# Altium PCB PCB2.PcbDoc (part 3 of 5)
Units mil, origin at the board's own origin, x right, y up, seen from the top; angles counter-clockwise.
Board outline 6000 x 4000 mil, 2 copper layers (Top Layer, Bottom Layer); 109 components, 117 nets, 490 pads, 96 vias.
Unrouted connection lines stored in the file: 3.
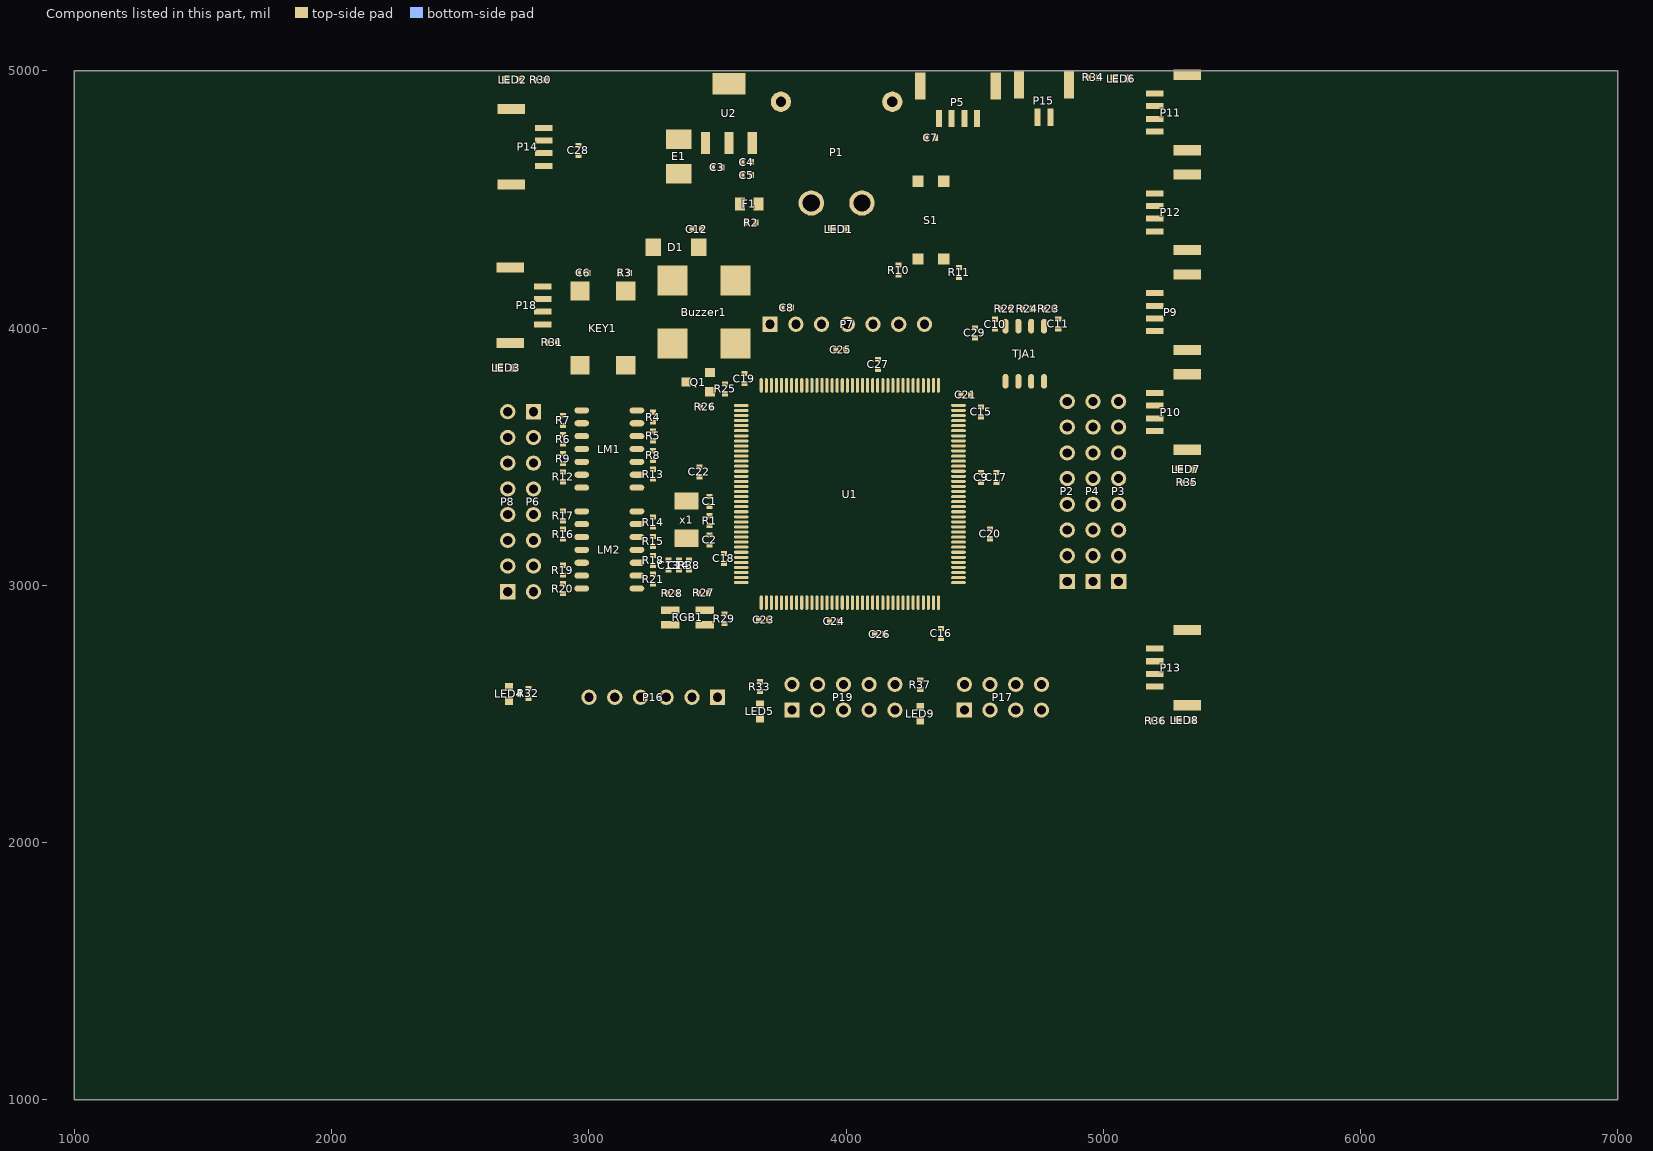
[diagram p3: the components of this part, seen from the top]

## Via types
v1: diameter 19.68, hole 11.81, Top Layer to Bottom Layer, tented both sides, 64 vias
v2: diameter 39, hole 30, Top Layer to Bottom Layer, tented both sides, 17 vias
v3: diameter 30, hole 20, Top Layer to Bottom Layer, tented both sides, 15 vias

## Nets (pads, with @x,y where several pads share a name; then routed paths per layer and width w, separated by ;. In a path a pad name is that pad's centre, name@x,y a point inside that pad or via, vN(x,y) a via of type N, cw(c..) or ccw(c..) an arc to the next point about the centre after c; other vN are vias at no path point) (continued)
copper on no net: (continued)
  Top Layer w1: 3344.33,2020 3448.67,2020 ; 3344.33,2021 3447.67,2021 ; 3344.33,2022 3446.67,2022 ; 3344.33,2023 3445.67,2023 ; 3344.33,2024 3443.67,2024 ; 3345.33,2017 3448.67,2017 ; 3345.33,2018 3448.67,2018 ; 3345.33,2019 3449.67,2019 ; 3346.33,2015 3447.67,2015 ; 3346.33,2016 3447.67,2016 ; 3347.33,2064 3532.67,2064 ; 3348.33,2063 3526.67,2063 ; 3348.33,2065 3535.67,2065 ; 3348.33,2066 3538.67,2066 ; 3348.33,2067 3540.67,2067 ; 3348.33,2068 3542.67,2068 ; 3349.33,2069 3544.67,2069 ; 3349.33,2070 3546.67,2070 ; 3349.33,2071 3548.67,2071 ; 3350.33,2072 3549.67,2072 ; 3350.33,2073 3551.67,2073 ; 3350.33,2074 3552.67,2074 ; 3350.33,2075 3554.67,2075 ; 3351.33,1933 3366.67,1933 ; 3351.33,1934 3366.67,1934 ; 3351.33,1935 3366.67,1935 ; 3351.33,1936 3366.67,1936 ; 3351.33,1937 3366.67,1937 ; 3351.33,1938 3366.67,1938 ; 3351.33,1939 3366.67,1939 ; 3351.33,1940 3366.67,1940 ; 3351.33,1941 3366.67,1941 ; 3351.33,1942 3366.67,1942 ; 3351.33,1943 3366.67,1943 ; 3351.33,1944 3366.67,1944 ; 3351.33,1945 3366.67,1945 ; 3351.33,1946 3366.67,1946 ; 3351.33,1947 3366.67,1947 ; 3351.33,1948 3366.67,1948 ; 3351.33,1949 3366.67,1949 ; 3351.33,1950 3366.67,1950 ; 3351.33,1951 3366.67,1951 ; 3351.33,1952 3366.67,1952 ; 3351.33,1953 3366.67,1953 ; 3351.33,1954 3366.67,1954 ; 3351.33,1955 3366.67,1955 ; 3351.33,1956 3366.67,1956 ; 3351.33,1957 3366.67,1957 ; 3351.33,1958 3366.67,1958 ; 3351.33,1959 3366.67,1959 ; 3351.33,1960 3366.67,1960 ; 3351.33,1961 3366.67,1961 ; 3351.33,1962 3366.67,1962 ; 3351.33,1963 3366.67,1963 ; 3351.33,1964 3366.67,1964 ; 3351.33,1965 3366.67,1965 ; 3351.33,1966 3366.67,1966 ; 3351.33,1967 3366.67,1967 ; 3351.33,1968 3366.67,1968 ; 3351.33,1969 3366.67,1969 ; 3351.33,1970 3366.67,1970 ; 3351.33,1971 3366.67,1971 ; 3351.33,1972 3366.67,1972 ; 3351.33,1973 3366.67,1973 ; 3351.33,1974 3366.67,1974 ; 3351.33,1975 3366.67,1975 ; 3351.33,1976 3366.67,1976 ; 3351.33,1977 3366.67,1977 ; 3351.33,1978 3366.67,1978 ; 3351.33,1979 3366.67,1979 ; 3351.33,1980 3366.67,1980 ; 3351.33,1981 3366.67,1981 ; 3351.33,1982 3366.67,1982 ; 3351.33,1983 3366.67,1983 ; 3351.33,1984 3366.67,1984 ; 3351.33,1985 3366.67,1985 ; 3351.33,1986 3366.67,1986 ; 3351.33,1987 3366.67,1987 ; 3351.33,1988 3366.67,1988 ; 3351.33,1989 3366.67,1989 ; 3351.33,1990 3366.67,1990 ; 3351.33,1991 3366.67,1991 ; 3351.33,1992 3366.67,1992 ; 3351.33,1993 3366.67,1993 ; 3351.33,1994 3440.67,1994 ; 3351.33,1995 3441.67,1995 ; 3351.33,1996 3441.67,1996 ; 3351.33,1997 3442.67,1997 ; 3351.33,1998 3443.67,1998 ; 3351.33,1999 3443.67,1999 ; 3351.33,2000 3444.67,2000 ; 3351.33,2001 3444.67,2001 ; 3351.33,2002 3443.67,2002 ; 3351.33,2003 3441.67,2003 ; 3351.33,2004 3366.67,2004 ; 3351.33,2005 3366.67,2005 ; 3351.33,2006 3366.67,2006 ; 3351.33,2007 3366.67,2007 ; 3351.33,2076 3555.67,2076 ; 3351.33,2077 3557.67,2077 ; 3351.33,2078 3558.67,2078 ; 3351.33,2079 3560.67,2079 ; 3352.33,2080 3561.67,2080 ; 3352.33,2081 3562.67,2081 ; 3352.33,2082 3564.67,2082 ; 3353.33,2083 3565.67,2083 ; 3353.33,2084 3566.67,2084 ; 3353.33,2085 3568.67,2085 ; 3353.33,2086 3569.67,2086 ; 3354.33,2087 3570.67,2087 ; 3354.33,2088 3572.67,2088 ; 3354.33,2089 3573.67,2089 ; 3354.33,2090 3574.67,2090 ; 3355.33,2091 3575.67,2091 ; 3355.33,2092 3577.67,2092 ; 3355.33,2093 3578.67,2093 ; 3355.33,2094 3579.67,2094 ; 3356.33,2095 3580.67,2095 ; 3356.33,2096 3582.67,2096 ; 3356.33,2097 3583.67,2097 ; 3357.33,2098 3584.67,2098 ; 3357.33,2099 3585.67,2099 ; 3357.33,2100 3587.67,2100 ; 3357.33,2101 3588.67,2101 ; 3358.33,2102 3589.67,2102 ; 3358.33,2103 3590.67,2103 ; 3358.33,2104 3761.67,2104 ; 3358.33,2105 3762.67,2105 ; 3359.33,2106 3763.67,2106 ; 3359.33,2107 3763.67,2107 ; 3359.33,2108 3764.67,2108 ; 3360.33,2109 3765.67,2109 ; 3360.33,2110 3766.67,2110 ; 3360.33,2111 3767.67,2111 ; 3360.33,2112 3767.67,2112 ; 3361.33,2113 3768.67,2113 ; 3361.33,2114 3769.67,2114 ; 3361.33,2115 3769.67,2115 ; 3361.33,2116 3770.67,2116 ; 3362.33,2117 3771.67,2117 ; 3362.33,2118 3771.67,2118 ; 3362.33,2119 3772.67,2119 ; 3362.33,2120 3772.67,2120 ; 3363.33,2121 3772.67,2121 ; 3363.33,2122 3772.67,2122 ; 3363.33,2123 3773.67,2123 ; 3364.33,2124 3773.67,2124 ; 3364.33,2125 3773.67,2125 ; 3364.33,2126 3434.67,2126 ; 3364.33,2127 3434.67,2127 ; 3365.33,2128 3434.67,2128 ; 3365.33,2129 3434.67,2129 ; 3365.33,2130 3434.67,2130 ; 3365.33,2131 3435.67,2131 ; 3366.33,2132 3435.67,2132 ; 3366.33,2133 3435.67,2133 ; 3366.33,2134 3436.67,2134 ; 3367.33,2135 3436.67,2135 ; 3367.33,2136 3436.67,2136 ; 3367.33,2137 3436.67,2137 ; 3367.33,2138 3437.67,2138 ; 3368.33,2139 3437.67,2139 ; 3368.33,2140 3437.67,2140 ; 3368.33,2141 3437.67,2141 ; 3368.33,2142 3438.67,2142 ; 3369.33,1960 3419.67,1960 ; 3369.33,1961 3418.67,1961 ; 3369.33,2143 3438.67,2143 ; 3369.33,2144 3438.67,2144 ; 3369.33,2145 3438.67,2145 ; 3369.33,2146 3439.67,2146 ; 3370.33,1956 3422.67,1956 ; 3370.33,1957 3422.67,1957 ; 3370.33,1958 3422.67,1958 ; 3370.33,1959 3420.67,1959 ; 3370.33,1978 3417.67,1978 ; 3370.33,2147 3439.67,2147 ; 3370.33,2148 3439.67,2148 ; 3370.33,2149 3440.67,2149 ; 3371.33,1953 3420.67,1953 ; 3371.33,1954 3420.67,1954 ; 3371.33,1955 3421.67,1955 ; 3371.33,1975 3420.67,1975 ; 3371.33,1976 3419.67,1976 ; 3371.33,1977 3418.67,1977 ; 3371.33,2150 3440.67,2150 ; 3371.33,2151 3440.67,2151 ; 3371.33,2152 3440.67,2152 ; 3371.33,2153 3441.67,2153 ; 3372.33,1972 3419.67,1972 ; 3372.33,1973 3420.67,1973 ; 3372.33,1974 3421.67,1974 ; 3372.33,2154 3441.67,2154 ; 3372.33,2155 3441.67,2155 ; 3372.33,2156 3441.67,2156 ; 3372.33,2157 3442.67,2157 ; 3373.33,1970 3418.67,1970 ; 3373.33,1971 3418.67,1971 ; 3373.33,2158 3442.67,2158 ; 3373.33,2159 3442.67,2159 ; 3373.33,2160 3442.67,2160 ; 3374.33,2161 3443.67,2161 ; 3374.33,2162 3443.67,2162 ; 3374.33,2163 3443.67,2163 ; 3374.33,2164 3444.67,2164 ; 3375.33,1992 3383.67,1992 ; 3375.33,2165 3444.67,2165 ; 3375.33,2166 3444.67,2166 ; 3375.33,2167 3444.67,2167 ; 3375.33,2168 3445.67,2168 ; 3376.33,1990 3387.67,1990 ; 3376.33,1991 3385.67,1991 ; 3376.33,1993 3381.67,1993 ; 3376.33,2169 3445.67,2169 ; 3376.33,2170 3445.67,2170 ; 3376.33,2171 3445.67,2171 ; 3376.33,2172 3446.67,2172 ; 3377.33,1988 3389.67,1988 ; 3377.33,1989 3388.67,1989 ; 3377.33,2173 3446.67,2173 ; 3377.33,2174 3446.67,2174 ; 3377.33,2175 3447.67,2175 ; 3378.33,1987 3390.67,1987 ; 3378.33,2176 3447.67,2176 ; 3378.33,2177 3447.67,2177 ; 3378.33,2178 3447.67,2178 ; 3378.33,2179 3448.67,2179 ; 3379.33,1985 3390.67,1985 ; 3379.33,1986 3390.67,1986 ; 3379.33,2180 3448.67,2180 ; 3379.33,2181 3448.67,2181 ; 3379.33,2182 3448.67,2182 ; 3379.33,2183 3449.67,2183 ; 3380.33,1983 3390.67,1983 ; 3380.33,1984 3390.67,1984 ; 3380.33,2184 3449.67,2184 ; 3380.33,2185 3449.67,2185 ; 3380.33,2186 3449.67,2186 ; 3380.33,2187 3450.67,2187 ; 3381.33,1981 3389.67,1981 ; 3381.33,1982 3389.67,1982 ; 3381.33,2188 3450.67,2188 ; 3381.33,2189 3450.67,2189 ; 3381.33,2190 3451.67,2190 ; 3382.33,1979 3387.67,1979 ; 3382.33,1980 3388.67,1980 ; 3382.33,2191 3451.67,2191 ; 3382.33,2192 3451.67,2192 ; 3382.33,2193 3451.67,2193 ; 3382.33,2194 3452.67,2194 ; 3383.33,2195 3452.67,2195 ; 3383.33,2196 3452.67,2196 ; 3383.33,2197 3452.67,2197 ; 3383.33,2198 3453.67,2198 ; 3384.33,2199 3453.67,2199 ; 3384.33,2200 3453.67,2200 ; 3384.33,2201 3453.67,2201 ; 3385.33,2004 3400.67,2004 ; 3385.33,2005 3400.67,2005 ; 3385.33,2202 3454.67,2202 ; 3385.33,2203 3454.67,2203 ; 3385.33,2204 3454.67,2204 ; 3385.33,2205 3454.67,2205 ; 3386.33,2006 3400.67,2006 ; 3386.33,2007 3400.67,2007 ; 3386.33,2008 3400.67,2008 ; 3386.33,2009 3400.67,2009 ; 3386.33,2010 3400.67,2010 ; 3386.33,2011 3400.67,2011 ; 3386.33,2012 3401.67,2012 ; 3386.33,2013 3401.67,2013 ; 3386.33,2014 3401.67,2014 ; 3386.33,2206 3455.67,2206 ; 3386.33,2207 3455.67,2207 ; 3386.33,2208 3455.67,2208 ; 3386.33,2209 3455.67,2209 ; 3387.33,1952 3401.67,1952 ; 3387.33,2025 3402.67,2025 ; 3387.33,2026 3402.67,2026 ; 3387.33,2027 3402.67,2027 ; 3387.33,2210 3456.67,2210 ; 3387.33,2211 3456.67,2211 ; 3387.33,2212 3456.67,2212 ; 3387.33,2213 3457.67,2213 ; 3388.33,1937 3401.67,1937 ; 3388.33,1938 3401.67,1938 ; 3388.33,1939 3401.67,1939 ; 3388.33,1940 3401.67,1940 ; 3388.33,1941 3401.67,1941 ; 3388.33,1942 3401.67,1942 ; 3388.33,1943 3401.67,1943 ; 3388.33,1944 3401.67,1944 ; 3388.33,1945 3401.67,1945 ; 3388.33,1946 3401.67,1946 ; 3388.33,1947 3401.67,1947 ; 3388.33,1948 3401.67,1948 ; 3388.33,1949 3401.67,1949 ; 3388.33,1950 3401.67,1950 ; 3388.33,1951 3401.67,1951 ; 3388.33,1962 3401.67,1962 ; 3388.33,1963 3401.67,1963 ; 3388.33,1964 3401.67,1964 ; 3388.33,1965 3401.67,1965 ; 3388.33,1966 3401.67,1966 ; 3388.33,1967 3401.67,1967 ; 3388.33,1968 3401.67,1968 ; 3388.33,1969 3401.67,1969 ; 3388.33,2028 3402.67,2028 ; 3388.33,2029 3402.67,2029 ; 3388.33,2030 3402.67,2030 ; 3388.33,2031 3403.67,2031 ; 3388.33,2032 3403.67,2032 ; 3388.33,2033 3403.67,2033 ; 3388.33,2034 3403.67,2034 ; 3388.33,2035 3403.67,2035 ; 3388.33,2036 3403.67,2036 ; 3388.33,2037 3403.67,2037 ; 3388.33,2214 3457.67,2214 ; 3388.33,2215 3457.67,2215 ; 3388.33,2216 3457.67,2216 ; 3389.33,2217 3458.67,2217 ; 3389.33,2218 3458.67,2218 ; 3389.33,2219 3458.67,2219 ; 3389.33,2220 3458.67,2220 ; 3390.33,2221 3459.67,2221 ; 3390.33,2222 3459.67,2222 ; 3390.33,2223 3459.67,2223 ; 3390.33,2224 3459.67,2224 ; 3391.33,2225 3460.67,2225 ; 3391.33,2226 3460.67,2226 ; 3391.33,2227 3460.67,2227 ; 3392.33,2228 3461.67,2228 ; 3392.33,2229 3461.67,2229 ; 3392.33,2230 3461.67,2230 ; 3392.33,2231 3461.67,2231 ; 3393.33,2232 3462.67,2232 ; 3393.33,2233 3462.67,2233 ; 3393.33,2234 3462.67,2234 ; 3393.33,2235 3462.67,2235 ; 3394.33,2236 3463.67,2236 ; 3394.33,2237 3463.67,2237 ; 3394.33,2238 3463.67,2238 ; 3394.33,2239 3463.67,2239 ; 3395.33,1979 3404.67,1979 ; 3395.33,2240 3464.67,2240 ; 3395.33,2241 3464.67,2241 ; 3395.33,2242 3464.67,2242 ; 3396.33,1980 3405.67,1980 ; 3396.33,2243 3465.67,2243 ; 3396.33,2244 3465.67,2244 ; 3396.33,2245 3465.67,2245 ; 3396.33,2246 3465.67,2246 ; 3397.33,1981 3406.67,1981 ; 3397.33,1982 3407.67,1982 ; 3397.33,2247 3466.67,2247 ; 3397.33,2248 3466.67,2248 ; 3397.33,2249 3466.67,2249 ; 3397.33,2250 3466.67,2250 ; 3398.33,1983 3408.67,1983 ; 3398.33,1984 3409.67,1984 ; 3398.33,2251 3467.67,2251 ; 3398.33,2252 3467.67,2252 ; 3398.33,2253 3467.67,2253 ; 3399.33,1985 3410.67,1985 ; 3399.33,1986 3411.67,1986 ; 3399.33,2254 3468.67,2254 ; 3399.33,2255 3468.67,2255 ; 3399.33,2256 3468.67,2256 ; 3399.33,2257 3468.67,2257 ; 3400.33,1987 3412.67,1987 ; 3400.33,1988 3412.67,1988 ; 3400.33,1989 3413.67,1989 ; 3400.33,2258 3469.67,2258 ; 3400.33,2259 3469.67,2259 ; 3400.33,2260 3469.67,2260 ; 3400.33,2261 3469.67,2261 ; 3401.33,1990 3414.67,1990 ; 3401.33,1991 3414.67,1991 ; 3401.33,1992 3412.67,1992 ; 3401.33,2262 3470.67,2262 ; 3401.33,2263 3470.67,2263 ; 3401.33,2264 3470.67,2264 ; 3401.33,2265 3470.67,2265 ; 3402.33,1993 3410.67,1993 ; 3402.33,2266 3471.67,2266 ; 3402.33,2267 3471.67,2267 ; 3402.33,2268 3471.67,2268 ; 3403.33,2269 3472.67,2269 ; 3403.33,2270 3472.67,2270 ; 3403.33,2271 3472.67,2271 ; 3403.33,2272 3472.67,2272 ; 3404.33,2273 3473.67,2273 ; 3404.33,2274 3473.67,2274 ; 3404.33,2275 3473.67,2275 ; 3404.33,2276 3473.67,2276 ; 3405.33,2277 3474.67,2277 ; 3405.33,2278 3474.67,2278 ; 3405.33,2279 3474.67,2279 ; 3406.33,2280 3475.67,2280 ; 3406.33,2281 3475.67,2281 ; 3406.33,2282 3475.67,2282 ; 3406.33,2283 3475.67,2283 ; 3407.33,2284 3476.67,2284 ; 3407.33,2285 3476.67,2285 ; 3407.33,2286 3476.67,2286 ; 3407.33,2287 3476.67,2287 ; 3408.33,1979 3415.67,1979 ; 3408.33,2288 3477.67,2288 ; 3408.33,2289 3477.67,2289 ; 3408.33,2290 3477.67,2290 ; 3408.33,2291 3477.67,2291 ; 3409.33,1980 3414.67,1980 ; 3409.33,2292 3478.67,2292 ; 3409.33,2293 3478.67,2293 ; 3409.33,2294 3478.67,2294 ; 3410.33,1940 3438.67,1940 ; 3410.33,1941 3439.67,1941 ; 3410.33,1942 3439.67,1942 ; 3410.33,1943 3439.67,1943 ; 3410.33,1944 3439.67,1944 ; 3410.33,1945 3439.67,1945 ; 3410.33,1946 3410.67,1946 ; 3410.33,1962 3417.67,1962 ; 3410.33,1981 3413.67,1981 ; 3410.33,2295 3479.67,2295 ; 3410.33,2296 3479.67,2296 ; 3410.33,2297 3479.67,2297 ; 3410.33,2298 3479.67,2298 ; 3411.33,1963 3416.67,1963 ; 3411.33,1982 3412.67,1982 ; 3411.33,2299 3480.67,2299 ; 3411.33,2300 3480.67,2300 ; 3411.33,2301 3480.67,2301 ; 3411.33,2302 3480.67,2302 ; 3412.33,1964 3415.67,1964 ; 3412.33,2303 3481.67,2303 ; 3412.33,2304 3481.67,2304 ; 3412.33,2305 3481.67,2305 ; 3412.33,2306 3482.67,2306 ; 3413.33,1965 3414.67,1965 ; 3413.33,2307 3482.67,2307 ; 3413.33,2308 3482.67,2308 ; 3413.33,2309 3482.67,2309 ; 3414.33,1939 3438.67,1939 ; 3414.33,2310 3483.67,2310 ; 3414.33,2311 3483.67,2311 ; 3414.33,2312 3483.67,2312 ; 3414.33,2313 3483.67,2313 ; 3415.33,2314 3484.67,2314 ; 3415.33,2315 3484.67,2315 ; 3415.33,2316 3484.67,2316 ; 3415.33,2317 3484.67,2317 ; 3416.33,1938 3438.67,1938 ; 3416.33,2318 3485.67,2318 ; 3416.33,2319 3485.67,2319 ; 3416.33,2320 3485.67,2320 ; 3417.33,2321 3486.67,2321 ; 3417.33,2322 3486.67,2322 ; 3417.33,2323 3486.67,2323 ; 3417.33,2324 3486.67,2324 ; 3418.33,1937 3437.67,1937 ; 3418.33,2325 3487.67,2325 ; 3418.33,2326 3487.67,2326 ; 3418.33,2327 3487.67,2327 ; 3418.33,2328 3487.67,2328 ; 3419.33,1936 3436.67,1936 ; 3419.33,2329 3488.67,2329 ; 3419.33,2330 3488.67,2330 ; 3419.33,2331 3488.67,2331 ; 3420.33,1935 3435.67,1935 ; 3421.33,1933 3433.67,1933 ; 3421.33,1934 3434.67,1934 ; 3421.33,1946 3439.67,1946 ; 3422.33,1931 3427.67,1931 ; 3422.33,1932 3431.67,1932 ; 3423.33,1947 3439.67,1947 ; 3424.33,1948 3439.67,1948 ; 3424.33,1949 3439.67,1949 ; 3424.33,1950 3439.67,1950 ; 3424.33,1952 3439.67,1952 ; 3424.33,1953 3439.67,1953 ; 3424.33,1954 3439.67,1954 ; 3424.33,1955 3439.67,1955 ; 3424.33,1956 3439.67,1956 ; 3424.33,1957 3439.67,1957 ; 3424.33,1958 3439.67,1958 ; 3424.33,1959 3439.67,1959 ; 3424.33,1960 3439.67,1960 ; 3424.33,1961 3439.67,1961 ; 3424.33,1962 3439.67,1962 ; 3424.33,1963 3439.67,1963 ; 3424.33,1964 3439.67,1964 ; 3424.33,1965 3439.67,1965 ; 3424.33,1966 3439.67,1966 ; 3424.33,1967 3439.67,1967 ; 3424.33,1968 3439.67,1968 ; 3424.33,1969 3439.67,1969 ; 3424.33,1970 3439.67,1970 ; 3424.33,1971 3439.67,1971 ; 3424.33,1972 3439.67,1972 ; 3424.33,1973 3439.67,1973 ; 3424.33,1974 3439.67,1974 ; 3424.33,1975 3439.67,1975 ; 3424.33,1976 3439.67,1976 ; 3424.33,1977 3439.67,1977 ; 3424.33,1978 3439.67,1978 ; 3424.33,1979 3439.67,1979 ; 3424.33,1980 3439.67,1980 ; 3424.33,1981 3439.67,1981 ; 3424.33,1982 3439.67,1982 ; 3424.33,1983 3439.67,1983 ; 3424.33,1984 3439.67,1984 ; 3424.33,1985 3439.67,1985 ; 3424.33,1986 3439.67,1986 ; 3424.33,1987 3439.67,1987 ; 3424.33,1988 3439.67,1988 ; 3424.33,1989 3439.67,1989 ; 3424.33,1990 3439.67,1990 ; 3424.33,1991 3439.67,1991 ; 3424.33,1992 3439.67,1992 ; 3424.33,1993 3439.67,1993 ; 3425.33,1951 3439.67,1951 ; 3425.33,2004 3440.67,2004 ; 3426.33,2005 3438.67,2005 ; 3427.33,2006 3437.67,2006 ; 3428.33,2007 3435.67,2007 ; 3429.33,2008 3434.67,2008 ; 3430.33,2009 3432.67,2009 ; 3430.33,2010 3431.67,2010 ; 3430.33,2025 3442.67,2025 ; 3431.33,2026 3441.67,2026 ; 3432.33,2027 3440.67,2027 ; 3433.33,2028 3439.67,2028 ; 3434.33,2029 3438.67,2029 ; 3435.33,2030 3436.67,2030 ; 3462.33,1951 3565.67,1951 ; 3462.33,1952 3563.67,1952 ; 3462.33,1953 3562.67,1953 ; 3463.33,1945 3565.67,1945 ; 3463.33,1946 3565.67,1946 ; 3463.33,1947 3566.67,1947 ; 3463.33,1948 3566.67,1948 ; 3463.33,1949 3567.67,1949 ; 3463.33,1950 3566.67,1950 ; 3464.33,1942 3563.67,1942 ; 3464.33,1943 3564.67,1943 ; 3464.33,1944 3564.67,1944 ; 3469.33,2018 3557.67,2018 ; 3469.33,2019 3557.67,2019 ; 3469.33,2020 3558.67,2020 ; 3469.33,2021 3557.67,2021 ; 3469.33,2022 3556.67,2022 ; 3469.33,2023 3554.67,2023 ; 3469.33,2024 3553.67,2024 ; 3470.33,2013 3554.67,2013 ; 3470.33,2014 3555.67,2014 ; 3470.33,2015 3555.67,2015 ; 3470.33,2016 3556.67,2016 ; 3470.33,2017 3556.67,2017 ; 3502.33,2126 3602.67,2126 ; 3504.33,2012 3521.67,2012 ; 3505.33,1954 3521.67,1954 ; 3505.33,1955 3521.67,1955 ; 3505.33,1956 3521.67,1956 ; 3505.33,1957 3521.67,1957 ; 3505.33,1958 3521.67,1958 ; 3505.33,1959 3521.67,1959 ; 3505.33,1960 3521.67,1960 ; 3505.33,1961 3521.67,1961 ; 3505.33,1962 3521.67,1962 ; 3505.33,1963 3521.67,1963 ; 3505.33,1964 3521.67,1964 ; 3505.33,1965 3521.67,1965 ; 3505.33,1966 3521.67,1966 ; 3505.33,1967 3521.67,1967 ; 3505.33,1968 3521.67,1968 ; 3505.33,1969 3521.67,1969 ; 3505.33,1970 3521.67,1970 ; 3505.33,1971 3521.67,1971 ; 3505.33,1972 3521.67,1972 ; 3505.33,1973 3521.67,1973 ; 3505.33,1974 3521.67,1974 ; 3505.33,1975 3521.67,1975 ; 3505.33,1976 3521.67,1976 ; 3505.33,1977 3521.67,1977 ; 3505.33,1978 3521.67,1978 ; 3505.33,1979 3521.67,1979 ; 3505.33,1980 3521.67,1980 ; 3505.33,1981 3521.67,1981 ; 3505.33,1982 3521.67,1982 ; 3505.33,1983 3521.67,1983 ; 3505.33,1984 3521.67,1984 ; 3505.33,1985 3521.67,1985 ; 3505.33,1986 3521.67,1986 ; 3505.33,1987 3521.67,1987 ; 3505.33,1988 3521.67,1988 ; 3505.33,1989 3521.67,1989 ; 3505.33,1990 3521.67,1990 ; 3505.33,1991 3521.67,1991 ; 3505.33,1992 3521.67,1992 ; 3505.33,1993 3521.67,1993 ; 3505.33,1994 3521.67,1994 ; 3505.33,1995 3521.67,1995 ; 3505.33,1996 3521.67,1996 ; 3505.33,1997 3521.67,1997 ; 3505.33,1998 3521.67,1998 ; 3505.33,1999 3521.67,1999 ; 3505.33,2000 3521.67,2000 ; 3505.33,2001 3521.67,2001 ; 3505.33,2002 3521.67,2002 ; 3505.33,2003 3521.67,2003 ; 3505.33,2004 3521.67,2004 ; 3505.33,2005 3521.67,2005 ; 3505.33,2006 3521.67,2006 ; 3505.33,2007 3521.67,2007 ; 3505.33,2008 3521.67,2008 ; 3505.33,2009 3521.67,2009 ; 3505.33,2010 3521.67,2010 ; 3505.33,2011 3521.67,2011 ; 3506.33,2127 3602.67,2127 ; 3509.33,2128 3602.67,2128 ; 3512.33,2129 3602.67,2129 ; 3514.33,2130 3603.67,2130 ; 3517.33,2131 3603.67,2131 ; 3519.33,2132 3603.67,2132 ; 3521.33,2133 3604.67,2133 ; 3523.33,2134 3604.67,2134 ; 3525.33,2135 3604.67,2135 ; 3526.33,2136 3604.67,2136 ; 3528.33,2137 3605.67,2137 ; 3529.33,2138 3605.67,2138 ; 3530.33,2139 3605.67,2139 ; 3531.33,2140 3605.67,2140 ; 3532.33,2141 3606.67,2141 ; 3533.33,2142 3606.67,2142 ; 3534.33,2143 3606.67,2143 ; 3535.33,2144 3606.67,2144 ; 3536.33,2145 3607.67,2145 ; 3537.33,2146 3607.67,2146 ; 3537.33,2147 3607.67,2147 ; 3538.33,2148 3608.67,2148 ; 3539.33,2149 3608.67,2149 ; 3539.33,2150 3608.67,2150 ; 3540.33,2151 3608.67,2151 ; 3541.33,2025 3551.67,2025 ; 3541.33,2026 3550.67,2026 ; 3541.33,2152 3609.67,2152 ; 3541.33,2153 3609.67,2153 ; 3542.33,2027 3548.67,2027 ; 3542.33,2154 3609.67,2154 ; 3542.33,2155 3609.67,2155 ; 3543.33,2028 3546.67,2028 ; 3543.33,2029 3545.67,2029 ; 3543.33,2156 3610.67,2156 ; 3544.33,2157 3610.67,2157 ; 3544.33,2158 3610.67,2158 ; 3545.33,2159 3611.67,2159 ; 3545.33,2160 3611.67,2160 ; 3545.33,2161 3611.67,2161 ; 3546.33,2162 3611.67,2162 ; 3546.33,2163 3612.67,2163 ; 3546.33,2164 3612.67,2164 ; 3546.33,2165 3612.67,2165 ; 3547.33,2166 3612.67,2166 ; 3547.33,2167 3613.67,2167 ; 3547.33,2168 3613.67,2168 ; 3548.33,2169 3613.67,2169 ; 3548.33,2170 3613.67,2170 ; 3548.33,2171 3614.67,2171 ; 3548.33,2172 3614.67,2172 ; 3549.33,1954 3561.67,1954 ; 3549.33,2173 3614.67,2173 ; 3549.33,2174 3615.67,2174 ; 3549.33,2175 3615.67,2175 ; 3549.33,2176 3615.67,2176 ; 3550.33,1955 3559.67,1955 ; 3550.33,2177 3615.67,2177 ; 3550.33,2178 3616.67,2178 ; 3550.33,2179 3616.67,2179 ; 3550.33,2180 3616.67,2180 ; 3551.33,1956 3558.67,1956 ; 3551.33,1957 3557.67,1957 ; 3551.33,2181 3616.67,2181 ; 3551.33,2182 3617.67,2182 ; 3551.33,2183 3617.67,2183 ; 3552.33,1958 3555.67,1958 ; 3552.33,1959 3554.67,1959 ; 3552.33,2184 3617.67,2184 ; 3552.33,2185 3618.67,2185 ; 3552.33,2186 3618.67,2186 ; 3552.33,2187 3618.67,2187 ; 3553.33,1960 3553.67,1960 ; 3553.33,2188 3618.67,2188 ; 3553.33,2189 3619.67,2189 ; 3553.33,2190 3619.67,2190 ; 3553.33,2191 3619.67,2191 ; 3554.33,2192 3619.67,2192 ; 3554.33,2193 3620.67,2193 ; 3554.33,2194 3620.67,2194 ; 3555.33,2195 3620.67,2195 ; 3555.33,2196 3620.67,2196 ; 3555.33,2197 3621.67,2197 ; 3555.33,2198 3621.67,2198 ; 3556.33,2199 3621.67,2199 ; 3556.33,2200 3622.67,2200 ; 3556.33,2201 3622.67,2201 ; 3556.33,2202 3622.67,2202 ; 3557.33,2203 3622.67,2203 ; 3557.33,2204 3623.67,2204 ; 3557.33,2205 3623.67,2205 ; 3557.33,2206 3623.67,2206 ; 3558.33,2207 3623.67,2207 ; 3558.33,2208 3624.67,2208 ; 3558.33,2209 3624.67,2209 ; 3559.33,2210 3624.67,2210 ; 3559.33,2211 3625.67,2211 ; 3559.33,2212 3625.67,2212 ; 3559.33,2213 3625.67,2213 ; 3560.33,2214 3625.67,2214 ; 3560.33,2215 3626.67,2215 ; 3560.33,2216 3626.67,2216 ; 3560.33,2217 3626.67,2217 ; 3561.33,2218 3626.67,2218 ; 3561.33,2219 3627.67,2219 ; 3561.33,2220 3627.67,2220 ; 3562.33,2221 3627.67,2221 ; 3562.33,2222 3627.67,2222 ; 3562.33,2223 3628.67,2223 ; 3562.33,2224 3628.67,2224 ; 3562.33,2225 3628.67,2225 ; 3563.33,2226 3629.67,2226 ; 3563.33,2227 3629.67,2227 ; 3563.33,2228 3629.67,2228 ; 3563.33,2229 3629.67,2229 ; 3564.33,2230 3630.67,2230 ; 3564.33,2231 3630.67,2231 ; 3564.33,2232 3630.67,2232 ; 3564.33,2233 3630.67,2233 ; 3565.33,2234 3631.67,2234 ; 3565.33,2235 3631.67,2235 ; 3565.33,2236 3631.67,2236 ; 3566.33,2237 3631.67,2237 ; 3566.33,2238 3632.67,2238 ; 3566.33,2239 3632.67,2239 ; 3566.33,2240 3632.67,2240 ; 3567.33,2241 3633.67,2241 ; 3567.33,2242 3633.67,2242 ; 3567.33,2243 3633.67,2243 ; 3567.33,2244 3633.67,2244 ; 3568.33,2245 3634.67,2245 ; 3568.33,2246 3634.67,2246 ; 3568.33,2247 3634.67,2247 ; 3569.33,2248 3634.67,2248 ; 3569.33,2249 3635.67,2249 ; 3569.33,2250 3635.67,2250 ; 3569.33,2251 3635.67,2251 ; 3570.33,2252 3636.67,2252 ; 3570.33,2253 3636.67,2253 ; 3570.33,2254 3636.67,2254 ; 3570.33,2255 3636.67,2255 ; 3571.33,2256 3637.67,2256 ; 3571.33,2257 3637.67,2257 ; 3571.33,2258 3637.67,2258 ; 3571.33,2259 3637.67,2259 ; 3572.33,2260 3638.67,2260 ; 3572.33,2261 3638.67,2261 ; 3572.33,2262 3638.67,2262 ; 3573.33,2263 3638.67,2263 ; 3573.33,2264 3639.67,2264 ; 3573.33,2265 3639.67,2265 ; 3573.33,2266 3639.67,2266 ; 3574.33,2267 3640.67,2267 ; 3574.33,2268 3640.67,2268 ; 3574.33,2269 3640.67,2269 ; 3574.33,2270 3640.67,2270 ; 3575.33,2271 3641.67,2271 ; 3575.33,2272 3641.67,2272 ; 3575.33,2273 3641.67,2273 ; 3576.33,2274 3641.67,2274 ; 3576.33,2275 3642.67,2275 ; 3576.33,2276 3642.67,2276 ; 3576.33,2277 3642.67,2277 ; 3577.33,2278 3643.67,2278 ; 3577.33,2279 3643.67,2279 ; 3577.33,2280 3643.67,2280 ; 3577.33,2281 3643.67,2281 ; 3578.33,2282 3644.67,2282 ; 3578.33,2283 3644.67,2283 ; 3578.33,2284 3644.67,2284 ; 3578.33,2285 3644.67,2285 ; 3579.33,2286 3645.67,2286 ; 3579.33,2287 3645.67,2287 ; 3579.33,2288 3645.67,2288 ; 3580.33,2289 3645.67,2289 ; 3580.33,2290 3646.67,2290 ; 3580.33,2291 3646.67,2291 ; 3580.33,2292 3646.67,2292 ; 3581.33,2293 3647.67,2293 ; 3581.33,2294 3647.67,2294 ; 3581.33,2295 3647.67,2295 ; 3581.33,2296 3647.67,2296 ; 3582.33,2063 3697.67,2063 ; 3582.33,2064 3703.67,2064 ; 3582.33,2065 3706.67,2065 ; 3582.33,2066 3709.67,2066 ; 3582.33,2297 3648.67,2297 ; 3582.33,2298 3648.67,2298 ; 3582.33,2299 3648.67,2299 ; 3583.33,2067 3711.67,2067 ; 3583.33,2068 3713.67,2068 ; 3583.33,2069 3716.67,2069 ; 3583.33,2070 3717.67,2070 ; 3583.33,2300 3648.67,2300 ; 3583.33,2301 3649.67,2301 ; 3583.33,2302 3649.67,2302 ; 3583.33,2303 3649.67,2303 ; 3584.33,2071 3719.67,2071 ; 3584.33,2072 3721.67,2072 ; 3584.33,2073 3723.67,2073 ; 3584.33,2074 3725.67,2074 ; 3584.33,2304 3650.67,2304 ; 3584.33,2305 3650.67,2305 ; 3584.33,2306 3650.67,2306 ; 3584.33,2307 3650.67,2307 ; 3585.33,1931 3599.67,1931 ; 3585.33,1932 3599.67,1932 ; 3585.33,1933 3599.67,1933 ; 3585.33,1934 3599.67,1934 ; 3585.33,1935 3599.67,1935 ; 3585.33,1936 3599.67,1936 ; 3585.33,1937 3599.67,1937 ; 3585.33,1938 3599.67,1938 ; 3585.33,1939 3599.67,1939 ; 3585.33,1940 3599.67,1940 ; 3585.33,1941 3599.67,1941 ; 3585.33,1942 3599.67,1942 ; 3585.33,1943 3599.67,1943 ; 3585.33,1944 3599.67,1944 ; 3585.33,1945 3599.67,1945 ; 3585.33,1946 3599.67,1946 ; 3585.33,1947 3599.67,1947 ; 3585.33,1948 3599.67,1948 ; 3585.33,1949 3599.67,1949 ; 3585.33,1950 3599.67,1950 ; 3585.33,1951 3599.67,1951 ; 3585.33,1952 3599.67,1952 ; 3585.33,1953 3599.67,1953 ; 3585.33,1954 3599.67,1954 ; 3585.33,1955 3599.67,1955 ; 3585.33,1956 3599.67,1956 ; 3585.33,1957 3599.67,1957 ; 3585.33,1958 3599.67,1958 ; 3585.33,1959 3599.67,1959 ; 3585.33,1960 3599.67,1960 ; 3585.33,1961 3599.67,1961 ; 3585.33,1962 3599.67,1962 ; 3585.33,1963 3599.67,1963 ; 3585.33,1964 3599.67,1964 ; 3585.33,1965 3599.67,1965 ; 3585.33,1966 3599.67,1966 ; 3585.33,1967 3599.67,1967 ; 3585.33,1968 3599.67,1968 ; 3585.33,1969 3599.67,1969 ; 3585.33,1970 3599.67,1970 ; 3585.33,1971 3599.67,1971 ; 3585.33,1972 3599.67,1972 ; 3585.33,1973 3599.67,1973 ; 3585.33,1974 3599.67,1974 ; 3585.33,1975 3599.67,1975 ; 3585.33,1976 3599.67,1976 ; 3585.33,1977 3599.67,1977 ; 3585.33,1978 3599.67,1978 ; 3585.33,1979 3599.67,1979 ; 3585.33,1980 3599.67,1980 ; 3585.33,1981 3599.67,1981 ; 3585.33,1982 3599.67,1982 ; 3585.33,1983 3599.67,1983 ; 3585.33,1984 3599.67,1984 ; 3585.33,1985 3599.67,1985 ; 3585.33,1986 3599.67,1986 ; 3585.33,1987 3599.67,1987 ; 3585.33,1988 3599.67,1988 ; 3585.33,1989 3599.67,1989 ; 3585.33,1990 3599.67,1990 ; 3585.33,1991 3599.67,1991 ; 3585.33,1992 3599.67,1992 ; 3585.33,1993 3599.67,1993 ; 3585.33,1994 3599.67,1994 ; 3585.33,1995 3599.67,1995 ; 3585.33,1996 3599.67,1996 ; 3585.33,1997 3599.67,1997 ; 3585.33,1998 3599.67,1998 ; 3585.33,1999 3599.67,1999 ; 3585.33,2000 3599.67,2000 ; 3585.33,2001 3599.67,2001 ; 3585.33,2002 3599.67,2002 ; 3585.33,2003 3599.67,2003 ; 3585.33,2004 3599.67,2004 ; 3585.33,2005 3599.67,2005 ; 3585.33,2006 3599.67,2006 ; 3585.33,2007 3599.67,2007 ; 3585.33,2008 3599.67,2008 ; 3585.33,2009 3599.67,2009 ; 3585.33,2010 3599.67,2010 ; 3585.33,2011 3599.67,2011 ; 3585.33,2012 3599.67,2012 ; 3585.33,2013 3599.67,2013 ; 3585.33,2014 3599.67,2014 ; 3585.33,2015 3599.67,2015 ; 3585.33,2016 3599.67,2016 ; 3585.33,2017 3599.67,2017 ; 3585.33,2018 3599.67,2018 ; 3585.33,2019 3599.67,2019 ; 3585.33,2020 3599.67,2020 ; 3585.33,2075 3726.67,2075 ; 3585.33,2076 3728.67,2076 ; 3585.33,2077 3729.67,2077 ; 3585.33,2078 3731.67,2078 ; 3585.33,2308 3651.67,2308 ; 3585.33,2309 3651.67,2309 ; 3585.33,2310 3651.67,2310 ; 3585.33,2311 3651.67,2311 ; 3586.33,2079 3732.67,2079 ; 3586.33,2080 3734.67,2080 ; 3586.33,2081 3735.67,2081 ; 3586.33,2312 3652.67,2312 ; 3586.33,2313 3652.67,2313 ; 3586.33,2314 3652.67,2314 ; 3587.33,2082 3737.67,2082 ; 3587.33,2083 3738.67,2083 ; 3587.33,2084 3739.67,2084 ; 3587.33,2085 3741.67,2085 ; 3587.33,2315 3652.67,2315 ; 3587.33,2316 3653.67,2316 ; 3587.33,2317 3653.67,2317 ; 3587.33,2318 3653.67,2318 ; 3588.33,2086 3742.67,2086 ; 3588.33,2087 3743.67,2087 ; 3588.33,2088 3744.67,2088 ; 3588.33,2089 3746.67,2089 ; 3588.33,2319 3654.67,2319 ; 3588.33,2320 3654.67,2320 ; 3588.33,2321 3654.67,2321 ; 3588.33,2322 3654.67,2322 ; 3589.33,2090 3747.67,2090 ; 3589.33,2091 3748.67,2091 ; 3589.33,2092 3749.67,2092 ; 3589.33,2323 3655.67,2323 ; 3589.33,2324 3655.67,2324 ; 3589.33,2325 3655.67,2325 ; 3590.33,2093 3750.67,2093 ; 3590.33,2094 3751.67,2094 ; 3590.33,2095 3752.67,2095 ; 3590.33,2096 3753.67,2096 ; 3590.33,2326 3655.67,2326 ; 3590.33,2327 3656.67,2327 ; 3590.33,2328 3656.67,2328 ; 3590.33,2329 3656.67,2329 ; 3591.33,2097 3754.67,2097 ; 3591.33,2098 3755.67,2098 ; 3591.33,2099 3756.67,2099 ; 3591.33,2100 3757.67,2100 ; 3591.33,2330 3657.67,2330 ; 3591.33,2331 3657.67,2331 ; 3592.33,2101 3758.67,2101 ; 3592.33,2102 3759.67,2102 ; 3592.33,2103 3760.67,2103 ; 3597.33,2034 3610.67,2034 ; 3598.33,2032 3613.67,2032 ; 3598.33,2033 3611.67,2033 ; 3598.33,2035 3608.67,2035 ; 3599.33,2031 3615.67,2031 ; 3599.33,2036 3606.67,2036 ; 3600.33,2029 3618.67,2029 ; 3600.33,2030 3616.67,2030 ; 3600.33,2037 3604.67,2037 ; 3601.33,2028 3619.67,2028 ; 3601.33,2038 3602.67,2038 ; 3602.33,2026 3619.67,2026 ; 3602.33,2027 3619.67,2027 ; 3603.33,2024 3618.67,2024 ; 3603.33,2025 3618.67,2025 ; 3604.33,2023 3617.67,2023 ; 3605.33,2021 3616.67,2021 ; 3605.33,2022 3617.67,2022 ; 3606.33,2019 3615.67,2019 ; 3606.33,2020 3616.67,2020 ; 3607.33,2017 3614.67,2017 ; 3607.33,2018 3615.67,2018 ; 3608.33,2015 3612.67,2015 ; 3608.33,2016 3613.67,2016 ; 3609.33,1953 3622.67,1953 ; 3609.33,1954 3622.67,1954 ; 3609.33,1955 3622.67,1955 ; 3609.33,1956 3622.67,1956 ; 3609.33,1957 3622.67,1957 ; 3609.33,1958 3651.67,1958 ; 3609.33,1959 3651.67,1959 ; 3609.33,1960 3651.67,1960 ; 3609.33,1961 3651.67,1961 ; 3609.33,1962 3651.67,1962 ; 3609.33,1963 3651.67,1963 ; 3609.33,1964 3651.67,1964 ; 3609.33,1965 3651.67,1965 ; 3609.33,1966 3651.67,1966 ; 3609.33,1967 3651.67,1967 ; 3609.33,1968 3651.67,1968 ; 3609.33,1969 3651.67,1969 ; 3609.33,1970 3622.67,1970 ; 3609.33,1971 3622.67,1971 ; 3609.33,1972 3622.67,1972 ; 3609.33,1973 3622.67,1973 ; 3609.33,1974 3622.67,1974 ; 3609.33,1975 3622.67,1975 ; 3609.33,1976 3622.67,1976 ; 3609.33,1977 3622.67,1977 ; 3609.33,1978 3622.67,1978 ; 3609.33,1979 3622.67,1979 ; 3609.33,1980 3622.67,1980 ; 3609.33,1981 3622.67,1981 ; 3609.33,1982 3622.67,1982 ; 3609.33,1983 3622.67,1983 ; 3609.33,1984 3622.67,1984 ; 3609.33,1985 3622.67,1985 ; 3609.33,1986 3622.67,1986 ; 3609.33,1987 3622.67,1987 ; 3609.33,1988 3622.67,1988 ; 3609.33,1989 3622.67,1989 ; 3609.33,1990 3622.67,1990 ; 3609.33,1991 3651.67,1991 ; 3609.33,1992 3651.67,1992 ; 3609.33,1993 3652.67,1993 ; 3609.33,1994 3653.67,1994 ; 3609.33,1995 3653.67,1995 ; 3609.33,1996 3654.67,1996 ; 3609.33,1997 3655.67,1997 ; 3609.33,1998 3655.67,1998 ; 3609.33,1999 3654.67,1999 ; 3609.33,2000 3653.67,2000 ; 3609.33,2001 3651.67,2001 ; 3609.33,2002 3622.67,2002 ; 3609.33,2003 3622.67,2003 ; 3609.33,2004 3622.67,2004 ; 3609.33,2014 3611.67,2014 ; 3623.33,2028 3676.67,2028 ; 3624.33,2023 3682.67,2023 ; 3624.33,2024 3682.67,2024 ; 3624.33,2025 3681.67,2025 ; 3624.33,2026 3679.67,2026 ; 3624.33,2027 3678.67,2027 ; 3624.33,2029 3675.67,2029 ; 3625.33,2018 3678.67,2018 ; 3625.33,2019 3679.67,2019 ; 3625.33,2020 3680.67,2020 ; 3625.33,2021 3680.67,2021 ; 3625.33,2022 3681.67,2022 ; 3638.33,1954 3651.67,1954 ; 3638.33,1955 3651.67,1955 ; 3638.33,1956 3651.67,1956 ; 3638.33,1957 3651.67,1957 ; 3638.33,1970 3651.67,1970 ; 3638.33,1971 3651.67,1971 ; 3638.33,1972 3651.67,1972 ; 3638.33,1973 3651.67,1973 ; 3638.33,1974 3651.67,1974 ; 3638.33,1975 3651.67,1975 ; 3638.33,1976 3651.67,1976 ; 3638.33,1977 3651.67,1977 ; 3638.33,1978 3651.67,1978 ; 3638.33,1979 3651.67,1979 ; 3638.33,1980 3651.67,1980 ; 3638.33,1981 3651.67,1981 ; 3638.33,1982 3651.67,1982 ; 3638.33,1983 3651.67,1983 ; 3638.33,1984 3651.67,1984 ; 3638.33,1985 3651.67,1985 ; 3638.33,1986 3651.67,1986 ; 3638.33,1987 3651.67,1987 ; 3638.33,1988 3651.67,1988 ; 3638.33,1989 3651.67,1989 ; 3638.33,1990 3651.67,1990 ; 3638.33,2002 3649.67,2002 ; 3639.33,1953 3651.67,1953 ; 3639.33,2003 3648.67,2003 ; 3639.33,2004 3646.67,2004 ; 3640.33,2005 3645.67,2005 ; 3641.33,2006 3643.67,2006 ; 3649.33,1939 3678.67,1939 ; 3649.33,1940 3678.67,1940 ; 3649.33,1941 3678.67,1941 ; 3649.33,1942 3678.67,1942 ; 3649.33,1943 3678.67,1943 ; 3649.33,1944 3678.67,1944 ; 3649.33,1945 3678.67,1945 ; 3652.33,1938 3677.67,1938 ; 3655.33,1937 3677.67,1937 ; 3657.33,1936 3676.67,1936 ; 3658.33,1935 3676.67,1935 ; 3659.33,1934 3675.67,1934 ; 3660.33,1931 3670.67,1931 ; 3660.33,1932 3672.67,1932 ; 3660.33,1933 3674.67,1933 ; 3661.33,1930 3666.67,1930 ; 3662.33,1946 3678.67,1946 ; 3663.33,1947 3678.67,1947 ; 3663.33,1948 3678.67,1948 ; 3663.33,1949 3678.67,1949 ; 3663.33,1950 3678.67,1950 ; 3663.33,1951 3678.67,1951 ; 3663.33,1952 3678.67,1952 ; 3663.33,1953 3678.67,1953 ; 3663.33,1954 3678.67,1954 ; 3663.33,1955 3678.67,1955 ; 3663.33,1956 3678.67,1956 ; 3663.33,1957 3678.67,1957 ; 3663.33,1958 3678.67,1958 ; 3663.33,1959 3678.67,1959 ; 3663.33,1960 3678.67,1960 ; 3663.33,1961 3678.67,1961 ; 3663.33,1962 3678.67,1962 ; 3663.33,1963 3678.67,1963 ; 3663.33,1964 3678.67,1964 ; 3663.33,1965 3678.67,1965 ; 3663.33,1966 3678.67,1966 ; 3663.33,1967 3678.67,1967 ; 3663.33,1968 3678.67,1968 ; 3663.33,1969 3678.67,1969 ; 3663.33,1970 3678.67,1970 ; 3663.33,1971 3678.67,1971 ; 3663.33,1972 3678.67,1972 ; 3663.33,1973 3678.67,1973 ; 3663.33,1974 3678.67,1974 ; 3663.33,1975 3678.67,1975 ; 3663.33,1976 3678.67,1976 ; 3663.33,1977 3678.67,1977 ; 3663.33,1978 3678.67,1978 ; 3663.33,1979 3678.67,1979 ; 3663.33,1980 3678.67,1980 ; 3663.33,1981 3678.67,1981 ; 3663.33,1982 3678.67,1982 ; 3663.33,1983 3678.67,1983 ; 3663.33,1984 3678.67,1984 ; 3663.33,1985 3678.67,1985 ; 3663.33,1986 3678.67,1986 ; 3663.33,1987 3678.67,1987 ; 3663.33,1988 3678.67,1988 ; 3663.33,1989 3678.67,1989 ; 3663.33,1990 3678.67,1990 ; 3663.33,1991 3678.67,1991 ; 3663.33,1992 3678.67,1992 ; 3663.33,1993 3678.67,1993 ; 3663.33,1994 3678.67,1994 ; 3663.33,1995 3678.67,1995 ; 3663.33,1996 3678.67,1996 ; 3663.33,1997 3678.67,1997 ; 3663.33,1998 3678.67,1998 ; 3663.33,1999 3678.67,1999 ; 3663.33,2000 3678.67,2000 ; 3663.33,2001 3678.67,2001 ; 3663.33,2002 3678.67,2002 ; 3663.33,2003 3678.67,2003 ; 3663.33,2004 3678.67,2004 ; 3663.33,2005 3678.67,2005 ; 3663.33,2006 3678.67,2006 ; 3663.33,2007 3678.67,2007 ; 3663.33,2008 3678.67,2008 ; 3663.33,2009 3678.67,2009 ; 3663.33,2010 3678.67,2010 ; 3663.33,2011 3678.67,2011 ; 3663.33,2012 3678.67,2012 ; 3663.33,2013 3678.67,2013 ; 3663.33,2014 3678.67,2014 ; 3663.33,2015 3678.67,2015 ; 3663.33,2016 3678.67,2016 ; 3663.33,2017 3678.67,2017 ; 3664.33,2030 3673.67,2030 ; 3664.33,2031 3671.67,2031 ; 3665.33,2032 3670.67,2032 ; 3666.33,2033 3668.67,2033 ; 3666.33,2034 3667.67,2034 ; 3674.33,2126 3774.67,2126 ; 3677.33,2127 3774.67,2127 ; 3681.33,2128 3774.67,2128 ; 3683.33,2129 3774.67,2129 ; 3686.33,2130 3775.67,2130 ; 3688.33,2131 3775.67,2131 ; 3691.33,2132 3775.67,2132 ; 3693.33,2133 3775.67,2133 ; 3695.33,2134 3775.67,2134 ; 3696.33,2135 3776.67,2135 ; 3698.33,2136 3776.67,2136 ; 3699.33,1935 3716.67,1935 ; 3699.33,1936 3717.67,1936 ; 3699.33,1937 3719.67,1937 ; 3699.33,2137 3776.67,2137 ; 3700.33,1934 3714.67,1934 ; 3700.33,1994 3800.67,1994 ; 3700.33,1995 3799.67,1995 ; 3700.33,1996 3798.67,1996 ; 3701.33,1933 3712.67,1933 ; 3701.33,1938 3721.67,1938 ; 3701.33,1988 3799.67,1988 ; 3701.33,1989 3799.67,1989 ; 3701.33,1990 3800.67,1990 ; 3701.33,1991 3800.67,1991 ; 3701.33,1992 3801.67,1992 ; 3701.33,1993 3801.67,1993 ; 3701.33,2138 3776.67,2138 ; 3702.33,1931 3707.67,1931 ; 3702.33,1932 3709.67,1932 ; 3702.33,1939 3722.67,1939 ; 3702.33,1985 3797.67,1985 ; 3702.33,1986 3798.67,1986 ; 3702.33,1987 3798.67,1987 ; 3702.33,2139 3777.67,2139 ; 3703.33,1930 3705.67,1930 ; 3703.33,2140 3777.67,2140 ; 3704.33,1940 3724.67,1940 ; 3704.33,2141 3777.67,2141 ; 3705.33,2142 3778.67,2142 ; 3706.33,1941 3725.67,1941 ; 3706.33,2143 3778.67,2143 ; 3707.33,1942 3727.67,1942 ; 3707.33,2144 3778.67,2144 ; 3707.33,2145 3778.67,2145 ; 3708.33,1943 3728.67,1943 ; 3708.33,2028 3790.67,2028 ; 3708.33,2146 3779.67,2146 ; 3709.33,2022 3792.67,2022 ; 3709.33,2023 3792.67,2023 ; 3709.33,2024 3793.67,2024 ; 3709.33,2025 3793.67,2025 ; 3709.33,2026 3793.67,2026 ; 3709.33,2027 3791.67,2027 ; 3709.33,2029 3788.67,2029 ; 3709.33,2147 3779.67,2147 ; 3710.33,1944 3729.67,1944 ; 3710.33,2018 3789.67,2018 ; 3710.33,2019 3790.67,2019 ; 3710.33,2020 3790.67,2020 ; 3710.33,2021 3791.67,2021 ; 3710.33,2148 3779.67,2148 ; 3710.33,2149 3779.67,2149 ; 3711.33,1945 3731.67,1945 ; 3711.33,2150 3780.67,2150 ; 3712.33,1946 3732.67,1946 ; 3712.33,2151 3780.67,2151 ; 3712.33,2152 3780.67,2152 ; 3713.33,2153 3781.67,2153 ; 3714.33,1947 3733.67,1947 ; 3714.33,2154 3781.67,2154 ; 3714.33,2155 3781.67,2155 ; 3715.33,1948 3734.67,1948 ; 3715.33,2156 3781.67,2156 ; 3715.33,2157 3782.67,2157 ; 3716.33,1949 3735.67,1949 ; 3716.33,2158 3782.67,2158 ; 3716.33,2159 3782.67,2159 ; 3717.33,1950 3736.67,1950 ; 3717.33,2160 3782.67,2160 ; 3717.33,2161 3783.67,2161 ; 3717.33,2162 3783.67,2162 ; 3718.33,1951 3737.67,1951 ; 3718.33,2163 3783.67,2163 ; 3718.33,2164 3783.67,2164 ; 3718.33,2165 3784.67,2165 ; 3718.33,2166 3784.67,2166 ; 3719.33,1952 3738.67,1952 ; 3719.33,2167 3784.67,2167 ; 3719.33,2168 3785.67,2168 ; 3719.33,2169 3785.67,2169 ; 3719.33,2170 3785.67,2170 ; 3720.33,1953 3739.67,1953 ; 3720.33,2171 3785.67,2171 ; 3720.33,2172 3786.67,2172 ; 3720.33,2173 3786.67,2173 ; 3721.33,1954 3739.67,1954 ; 3721.33,2174 3786.67,2174 ; 3721.33,2175 3786.67,2175 ; 3721.33,2176 3787.67,2176 ; 3721.33,2177 3787.67,2177 ; 3722.33,1955 3740.67,1955 ; 3722.33,2178 3787.67,2178 ; 3722.33,2179 3788.67,2179 ; 3722.33,2180 3788.67,2180 ; 3722.33,2181 3788.67,2181 ; 3723.33,1956 3741.67,1956 ; 3723.33,1957 3742.67,1957 ; 3723.33,2182 3788.67,2182 ; 3723.33,2183 3789.67,2183 ; 3723.33,2184 3789.67,2184 ; 3723.33,2185 3789.67,2185 ; 3724.33,1958 3743.67,1958 ; 3724.33,2186 3789.67,2186 ; 3724.33,2187 3790.67,2187 ; 3724.33,2188 3790.67,2188 ; 3725.33,1959 3743.67,1959 ; 3725.33,2189 3790.67,2189 ; 3725.33,2190 3790.67,2190 ; 3725.33,2191 3791.67,2191 ; 3725.33,2192 3791.67,2192 ; 3726.33,1960 3744.67,1960 ; 3726.33,1961 3745.67,1961 ; 3726.33,2193 3791.67,2193 ; 3726.33,2194 3792.67,2194 ; 3726.33,2195 3792.67,2195 ; 3726.33,2196 3792.67,2196 ; 3727.33,1962 3745.67,1962 ; 3727.33,2197 3792.67,2197 ; 3727.33,2198 3793.67,2198 ; 3727.33,2199 3793.67,2199 ; 3728.33,1963 3746.67,1963 ; 3728.33,1964 3746.67,1964 ; 3728.33,2200 3793.67,2200 ; 3728.33,2201 3793.67,2201 ; 3728.33,2202 3794.67,2202 ; 3728.33,2203 3794.67,2203 ; 3729.33,1965 3747.67,1965 ; 3729.33,2204 3794.67,2204 ; 3729.33,2205 3795.67,2205 ; 3729.33,2206 3795.67,2206 ; 3729.33,2207 3795.67,2207 ; 3730.33,1966 3748.67,1966 ; 3730.33,1967 3748.67,1967 ; 3730.33,2208 3795.67,2208 ; 3730.33,2209 3796.67,2209 ; 3730.33,2210 3796.67,2210 ; 3730.33,2211 3796.67,2211 ; 3731.33,1968 3749.67,1968 ; 3731.33,1969 3749.67,1969 ; 3731.33,2212 3796.67,2212 ; 3731.33,2213 3797.67,2213 ; 3731.33,2214 3797.67,2214 ; 3732.33,1970 3749.67,1970 ; 3732.33,1971 3750.67,1971 ; 3732.33,2215 3797.67,2215 ; 3732.33,2216 3797.67,2216 ; 3732.33,2217 3798.67,2217 ; 3732.33,2218 3798.67,2218 ; 3733.33,1972 3766.67,1972 ; 3733.33,1973 3766.67,1973 ; 3733.33,1974 3765.67,1974 ; 3733.33,2219 3798.67,2219 ; 3733.33,2220 3799.67,2220 ; 3733.33,2221 3799.67,2221 ; 3733.33,2222 3799.67,2222 ; 3734.33,1975 3764.67,1975 ; 3734.33,1976 3763.67,1976 ; 3734.33,1977 3763.67,1977 ; 3734.33,2223 3799.67,2223 ; 3734.33,2224 3800.67,2224 ; 3734.33,2225 3800.67,2225 ; 3734.33,2226 3800.67,2226 ; 3735.33,1978 3762.67,1978 ; 3735.33,1979 3761.67,1979 ; 3735.33,1980 3761.67,1980 ; 3735.33,2227 3800.67,2227 ; 3735.33,2228 3801.67,2228 ; 3735.33,2229 3801.67,2229 ; 3736.33,1981 3760.67,1981 ; 3736.33,1982 3759.67,1982 ; 3736.33,1983 3759.67,1983 ; 3736.33,1984 3758.67,1984 ; 3736.33,2230 3801.67,2230 ; 3736.33,2231 3802.67,2231 ; 3736.33,2232 3802.67,2232 ; 3736.33,2233 3802.67,2233 ; 3737.33,2234 3802.67,2234 ; 3737.33,2235 3803.67,2235 ; 3737.33,2236 3803.67,2236 ; 3737.33,2237 3803.67,2237 ; 3738.33,1997 3756.67,1997 ; 3738.33,1998 3756.67,1998 ; 3738.33,2238 3803.67,2238 ; 3738.33,2239 3804.67,2239 ; 3738.33,2240 3804.67,2240 ; 3739.33,1999 3756.67,1999 ; 3739.33,2000 3756.67,2000 ; 3739.33,2001 3756.67,2001 ; 3739.33,2002 3756.67,2002 ; 3739.33,2003 3756.67,2003 ; 3739.33,2004 3756.67,2004 ; 3739.33,2005 3756.67,2005 ; 3739.33,2006 3756.67,2006 ; 3739.33,2007 3756.67,2007 ; 3739.33,2008 3756.67,2008 ; 3739.33,2009 3756.67,2009 ; 3739.33,2010 3756.67,2010 ; 3739.33,2011 3756.67,2011 ; 3739.33,2012 3756.67,2012 ; 3739.33,2013 3756.67,2013 ; 3739.33,2014 3756.67,2014 ; 3739.33,2015 3756.67,2015 ; 3739.33,2016 3756.67,2016 ; 3739.33,2017 3757.67,2017 ; 3739.33,2241 3804.67,2241 ; 3739.33,2242 3804.67,2242 ; 3739.33,2243 3805.67,2243 ; 3739.33,2244 3805.67,2244 ; 3740.33,2245 3805.67,2245 ; 3740.33,2246 3806.67,2246 ; 3740.33,2247 3806.67,2247 ; 3740.33,2248 3806.67,2248 ; 3741.33,2249 3806.67,2249 ; 3741.33,2250 3807.67,2250 ; 3741.33,2251 3807.67,2251 ; 3741.33,2252 3807.67,2252 ; 3742.33,2253 3807.67,2253 ; 3742.33,2254 3808.67,2254 ; 3742.33,2255 3808.67,2255 ; 3743.33,2256 3808.67,2256 ; 3743.33,2257 3809.67,2257 ; 3743.33,2258 3809.67,2258 ; 3743.33,2259 3809.67,2259 ; 3744.33,2260 3809.67,2260 ; 3744.33,2261 3810.67,2261 ; 3744.33,2262 3810.67,2262 ; 3744.33,2263 3810.67,2263 ; 3745.33,2264 3810.67,2264 ; 3745.33,2265 3811.67,2265 ; 3745.33,2266 3811.67,2266 ; 3746.33,2267 3811.67,2267 ; 3746.33,2268 3811.67,2268 ; 3746.33,2269 3812.67,2269 ; 3746.33,2270 3812.67,2270 ; 3747.33,2271 3812.67,2271 ; 3747.33,2272 3813.67,2272 ; 3747.33,2273 3813.67,2273 ; 3747.33,2274 3813.67,2274 ; 3748.33,2275 3813.67,2275 ; 3748.33,2276 3814.67,2276 ; 3748.33,2277 3814.67,2277 ; 3748.33,2278 3814.67,2278 ; 3749.33,2279 3814.67,2279 ; 3749.33,2280 3815.67,2280 ; 3749.33,2281 3815.67,2281 ; 3750.33,2282 3815.67,2282 ; 3750.33,2283 3815.67,2283 ; 3750.33,2284 3816.67,2284 ; 3750.33,2285 3816.67,2285 ; 3751.33,2286 3816.67,2286 ; 3751.33,2287 3817.67,2287 ; 3751.33,2288 3817.67,2288 ; 3751.33,2289 3817.67,2289 ; 3752.33,1971 3767.67,1971 ; 3752.33,2290 3817.67,2290 ; 3752.33,2291 3818.67,2291 ; 3752.33,2292 3818.67,2292 ; 3753.33,1968 3770.67,1968 ; 3753.33,1969 3769.67,1969 ; 3753.33,1970 3768.67,1970 ; 3753.33,2293 3818.67,2293 ; 3753.33,2294 3818.67,2294 ; 3753.33,2295 3819.67,2295 ; 3753.33,2296 3819.67,2296 ; 3754.33,1966 3772.67,1966 ; 3754.33,1967 3771.67,1967 ; 3754.33,2297 3819.67,2297 ; 3754.33,2298 3820.67,2298 ; 3754.33,2299 3820.67,2299 ; 3754.33,2300 3820.67,2300 ; 3755.33,1964 3774.67,1964 ; 3755.33,1965 3773.67,1965 ; 3755.33,2301 3820.67,2301 ; 3755.33,2302 3821.67,2302 ; 3755.33,2303 3821.67,2303 ; 3755.33,2304 3821.67,2304 ; 3756.33,1962 3776.67,1962 ; 3756.33,1963 3775.67,1963 ; 3756.33,2305 3821.67,2305 ; 3756.33,2306 3822.67,2306 ; 3756.33,2307 3822.67,2307 ; 3757.33,1960 3778.67,1960 ; 3757.33,1961 3777.67,1961 ; 3757.33,2308 3822.67,2308 ; 3757.33,2309 3822.67,2309 ; 3757.33,2310 3823.67,2310 ; 3757.33,2311 3823.67,2311 ; 3758.33,1958 3781.67,1958 ; 3758.33,1959 3780.67,1959 ; 3758.33,2312 3823.67,2312 ; 3758.33,2313 3824.67,2313 ; 3758.33,2314 3824.67,2314 ; 3758.33,2315 3824.67,2315 ; 3759.33,1956 3784.67,1956 ; 3759.33,1957 3783.67,1957 ; 3759.33,2316 3824.67,2316 ; 3759.33,2317 3825.67,2317 ; 3759.33,2318 3825.67,2318 ; 3760.33,1955 3786.67,1955 ; 3760.33,2319 3825.67,2319 ; 3760.33,2320 3825.67,2320 ; 3760.33,2321 3826.67,2321 ; 3760.33,2322 3826.67,2322 ; 3761.33,1953 3789.67,1953 ; 3761.33,1954 3787.67,1954 ; 3761.33,2323 3826.67,2323 ; 3761.33,2324 3827.67,2324 ; 3761.33,2325 3827.67,2325 ; 3761.33,2326 3827.67,2326 ; 3762.33,1952 3791.67,1952 ; 3762.33,2327 3827.67,2327 ; 3762.33,2328 3828.67,2328 ; 3762.33,2329 3828.67,2329 ; 3762.33,2330 3828.67,2330 ; 3763.33,1951 3793.67,1951 ; 3763.33,2331 3828.67,2331 ; 3764.33,1949 3797.67,1949 ; 3764.33,1950 3795.67,1950 ; 3765.33,1948 3800.67,1948 ; 3766.33,1947 3803.67,1947 ; 3767.33,1946 3803.67,1946 ; 3768.33,1945 3802.67,1945 ; 3769.33,1944 3801.67,1944 ; 3770.33,1943 3799.67,1943 ; 3771.33,1942 3798.67,1942 ; 3772.33,1941 3797.67,1941 ; 3773.33,1940 3796.67,1940 ; 3774.33,1939 3795.67,1939 ; 3775.33,1938 3794.67,1938 ; 3776.33,1937 3793.67,1937 ; 3776.33,2030 3787.67,2030 ; 3776.33,2031 3785.67,2031 ; 3777.33,1936 3792.67,1936 ; 3777.33,2032 3784.67,2032 ; 3778.33,2033 3782.67,2033 ; 3778.33,2034 3781.67,2034 ; 3779.33,1935 3791.67,1935 ; 3779.33,2035 3779.67,2035 ; 3780.33,1934 3790.67,1934 ; 3781.33,1933 3790.67,1933 ; 3783.33,1932 3789.67,1932 ; 3783.33,1997 3796.67,1997 ; 3784.33,1998 3795.67,1998 ; 3785.33,1931 3788.67,1931 ; 3785.33,1999 3793.67,1999 ; 3785.33,2000 3792.67,2000 ; 3786.33,1930 3787.67,1930 ; 3786.33,2001 3791.67,2001 ; 3787.33,2002 3789.67,2002 ; 3788.33,2003 3788.67,2003 ; 3814.33,2001 3921.67,2001 ; 3814.33,2002 3920.67,2002 ; 3814.33,2003 3919.67,2003 ; 3814.33,2004 3917.67,2004 ; 3815.33,1996 3918.67,1996 ; 3815.33,1997 3918.67,1997 ; 3815.33,1998 3919.67,1998 ; 3815.33,1999 3919.67,1999 ; 3815.33,2000 3920.67,2000 ; 3816.33,1935 3843.67,1935 ; 3817.33,1933 3838.67,1933 ; 3817.33,1934 3840.67,1934 ; 3818.33,1931 3831.67,1931 ; 3818.33,1932 3835.67,1932 ; 3819.33,1930 3826.67,1930 ; 3819.33,1936 3845.67,1936 ; 3820.33,1929 3820.67,1929 ; 3821.33,2025 3911.67,2025 ; 3821.33,2026 3910.67,2026 ; 3822.33,1937 3847.67,1937 ; 3822.33,2020 3913.67,2020 ; 3822.33,2021 3913.67,2021 ; 3822.33,2022 3914.67,2022 ; 3822.33,2023 3914.67,2023 ; 3822.33,2024 3913.67,2024 ; 3823.33,2018 3911.67,2018 ; 3823.33,2019 3912.67,2019 ; 3825.33,1938 3848.67,1938 ; 3827.33,1939 3850.67,1939 ; 3829.33,1940 3851.67,1940 ; 3829.33,1959 3844.67,1959 ; 3829.33,1960 3844.67,1960 ; 3829.33,1961 3844.67,1961 ; 3829.33,1962 3903.67,1962 ; 3829.33,1963 3903.67,1963 ; 3829.33,1964 3903.67,1964 ; 3829.33,1965 3903.67,1965 ; 3829.33,1966 3903.67,1966 ; 3829.33,1967 3903.67,1967 ; 3829.33,1968 3903.67,1968 ; 3829.33,1969 3903.67,1969 ; 3829.33,1970 3903.67,1970 ; 3829.33,1971 3844.67,1971 ; 3829.33,1972 3844.67,1972 ; 3829.33,1973 3844.67,1973 ; 3829.33,1974 3844.67,1974 ; 3829.33,1975 3844.67,1975 ; 3829.33,1976 3844.67,1976 ; 3829.33,1977 3844.67,1977 ; 3829.33,1978 3844.67,1978 ; 3829.33,1979 3844.67,1979 ; 3829.33,1980 3904.67,1980 ; 3829.33,1981 3905.67,1981 ; 3829.33,1982 3905.67,1982 ; 3829.33,1983 3906.67,1983 ; 3829.33,1984 3907.67,1984 ; 3829.33,1985 3907.67,1985 ; 3829.33,1986 3906.67,1986 ; 3829.33,1987 3904.67,1987 ; 3829.33,1988 3902.67,1988 ; 3829.33,1989 3844.67,1989 ; 3829.33,1990 3844.67,1990 ; 3829.33,1991 3844.67,1991 ; 3831.33,1941 3852.67,1941 ; 3833.33,1942 3853.67,1942 ; 3835.33,1943 3854.67,1943 ; 3837.33,1944 3855.67,1944 ; 3838.33,1945 3856.67,1945 ; 3839.33,1946 3857.67,1946 ; 3839.33,2015 3851.67,2015 ; 3839.33,2016 3850.67,2016 ; 3840.33,2014 3853.67,2014 ; 3840.33,2017 3849.67,2017 ; 3841.33,1947 3858.67,1947 ; 3841.33,2012 3857.67,2012 ; 3841.33,2013 3855.67,2013 ; 3842.33,1948 3858.67,1948 ; 3842.33,2011 3858.67,2011 ; 3843.33,1949 3859.67,1949 ; 3843.33,1950 3859.67,1950 ; 3843.33,2010 3858.67,2010 ; 3844.33,1951 3860.67,1951 ; 3844.33,2008 3857.67,2008 ; 3844.33,2009 3858.67,2009 ; 3845.33,1952 3860.67,1952 ; 3845.33,2006 3856.67,2006 ; 3845.33,2007 3857.67,2007 ; 3846.33,1953 3861.67,1953 ; 3846.33,1954 3861.67,1954 ; 3846.33,2005 3856.67,2005 ; 3847.33,1955 3861.67,1955 ; 3847.33,1956 3862.67,1956 ; 3848.33,1957 3862.67,1957 ; 3848.33,1958 3862.67,1958 ; 3848.33,1959 3862.67,1959 ; 3848.33,1960 3862.67,1960 ; 3848.33,1961 3863.67,1961 ; 3855.33,2035 3871.67,2035 ; 3855.33,2036 3869.67,2036 ; 3856.33,2034 3873.67,2034 ; 3856.33,2037 3866.67,2037 ; 3857.33,2032 3875.67,2032 ; 3857.33,2033 3874.67,2033 ; 3857.33,2038 3863.67,2038 ; 3857.33,2039 3860.67,2039 ; 3858.33,2031 3875.67,2031 ; 3859.33,2030 3875.67,2030 ; 3860.33,2029 3874.67,2029 ; 3861.33,2028 3874.67,2028 ; 3862.33,2027 3873.67,2027 ; 3871.33,1943 3917.67,1943 ; 3871.33,1944 3917.67,1944 ; 3871.33,1945 3918.67,1945 ; 3871.33,1946 3887.67,1946 ; 3871.33,1947 3886.67,1947 ; 3871.33,1948 3886.67,1948 ; 3871.33,1949 3885.67,1949 ; 3871.33,1950 3885.67,1950 ; 3871.33,1951 3885.67,1951 ; 3871.33,1952 3885.67,1952 ; 3871.33,1953 3885.67,1953 ; 3871.33,1954 3885.67,1954 ; 3871.33,1955 3885.67,1955 ; 3871.33,1956 3885.67,1956 ; 3871.33,1957 3885.67,1957 ; 3871.33,1958 3885.67,1958 ; 3871.33,1959 3885.67,1959 ; 3871.33,1960 3885.67,1960 ; 3871.33,1961 3886.67,1961 ; 3872.33,1939 3916.67,1939 ; 3872.33,1940 3916.67,1940 ; 3872.33,1941 3917.67,1941 ; 3872.33,1942 3917.67,1942 ; 3873.33,1937 3915.67,1937 ; 3873.33,1938 3915.67,1938 ; 3874.33,1936 3914.67,1936 ; 3875.33,1935 3914.67,1935 ; 3875.33,2005 3886.67,2005 ; 3876.33,1934 3913.67,1934 ; 3876.33,2006 3887.67,2006 ; 3876.33,2007 3888.67,2007 ; 3876.33,2275 4139.67,2275 ; 3876.33,2276 4139.67,2276 ; 3877.33,2008 3889.67,2008 ; 3877.33,2009 3890.67,2009 ; 3877.33,2277 4138.67,2277 ; 3877.33,2278 4138.67,2278 ; 3877.33,2279 4138.67,2279 ; 3877.33,2280 4138.67,2280 ; 3878.33,1933 3912.67,1933 ; 3878.33,2010 3891.67,2010 ; 3878.33,2011 3892.67,2011 ; 3878.33,2012 3893.67,2012 ; 3878.33,2281 4138.67,2281 ; 3878.33,2282 4137.67,2282 ; 3878.33,2283 4137.67,2283 ; 3879.33,2013 3894.67,2013 ; 3879.33,2014 3894.67,2014 ; 3879.33,2284 4137.67,2284 ; 3879.33,2285 4137.67,2285 ; 3879.33,2286 4136.67,2286 ; 3879.33,2287 4136.67,2287 ; 3880.33,2015 3891.67,2015 ; 3880.33,2016 3889.67,2016 ; 3880.33,2017 3888.67,2017 ; 3880.33,2288 4136.67,2288 ; 3880.33,2289 4135.67,2289 ; 3880.33,2290 4135.67,2290 ; 3880.33,2291 4134.67,2291 ; 3881.33,1932 3910.67,1932 ; 3881.33,2292 4134.67,2292 ; 3881.33,2293 4134.67,2293